# Altium PCB PCB22-guillaume.PcbDoc
Units mm, origin at the board's own origin, x right, y up, seen from the top; angles counter-clockwise.
Board outline 123.19 x 80.01 mm, 2 copper layers (Top Layer, Bottom Layer); 33 components, 35 nets, 117 pads, 23 vias.
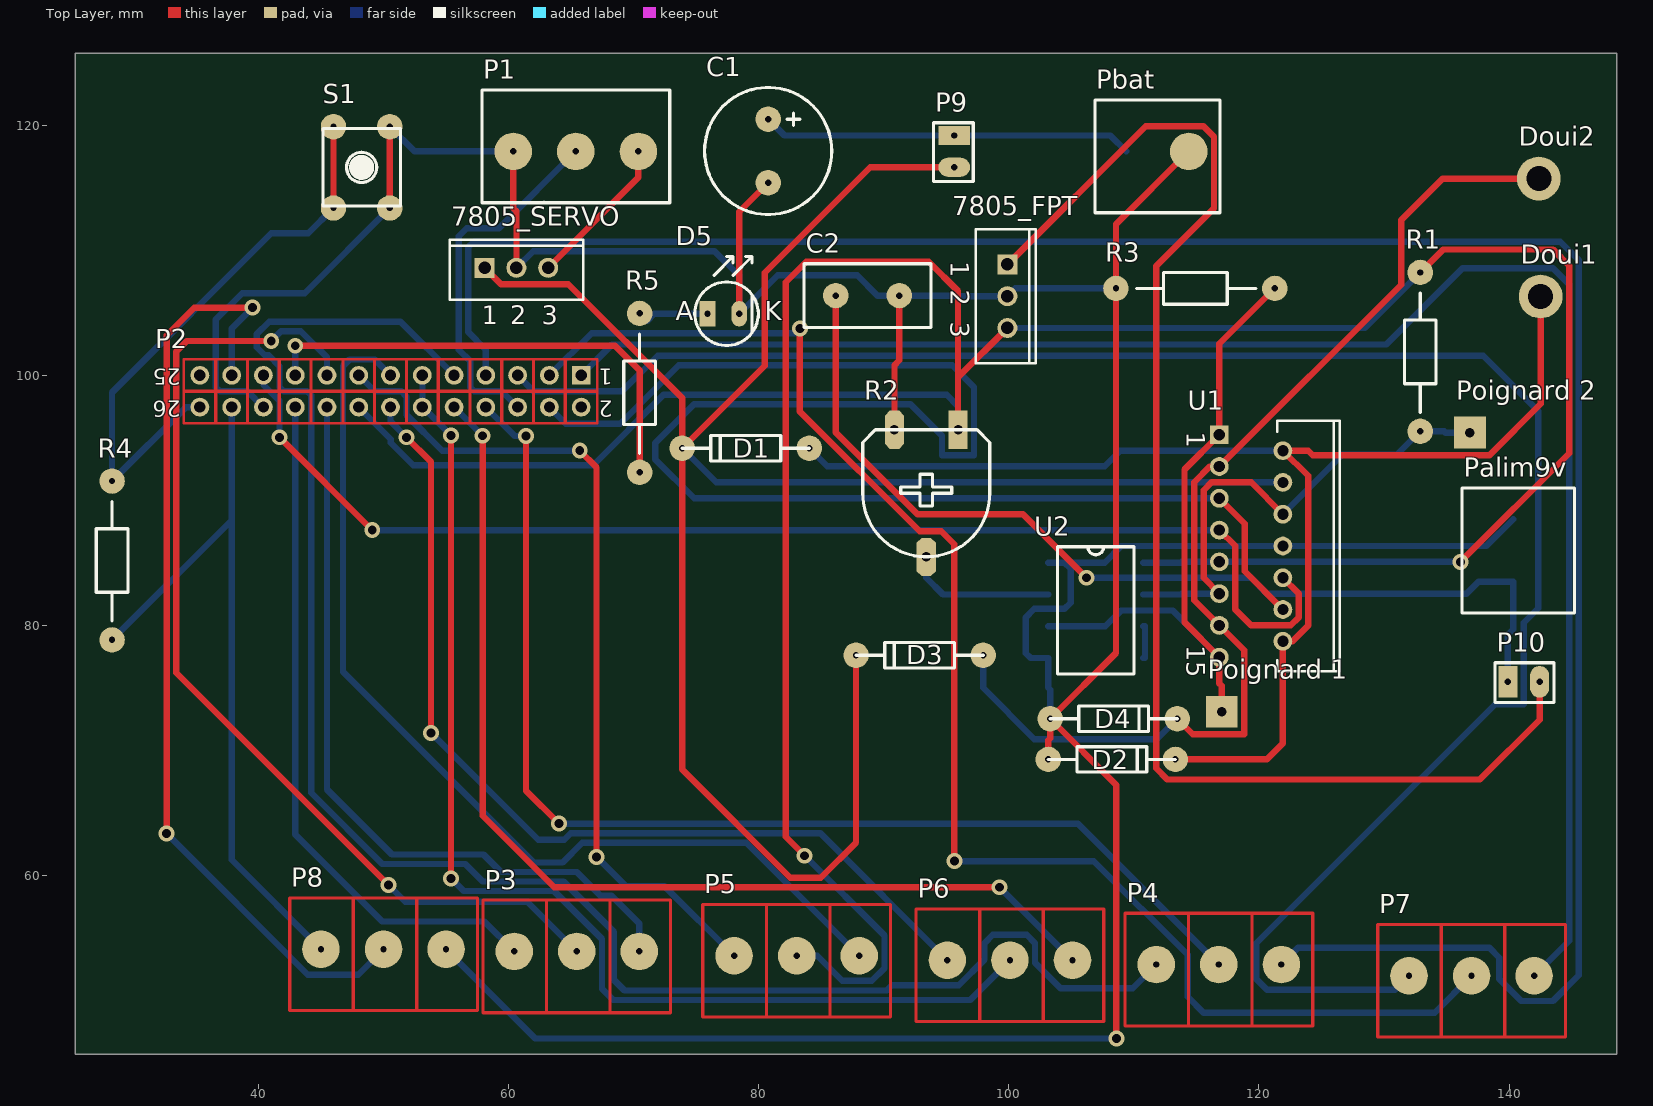
[diagram p0: Top Layer view]
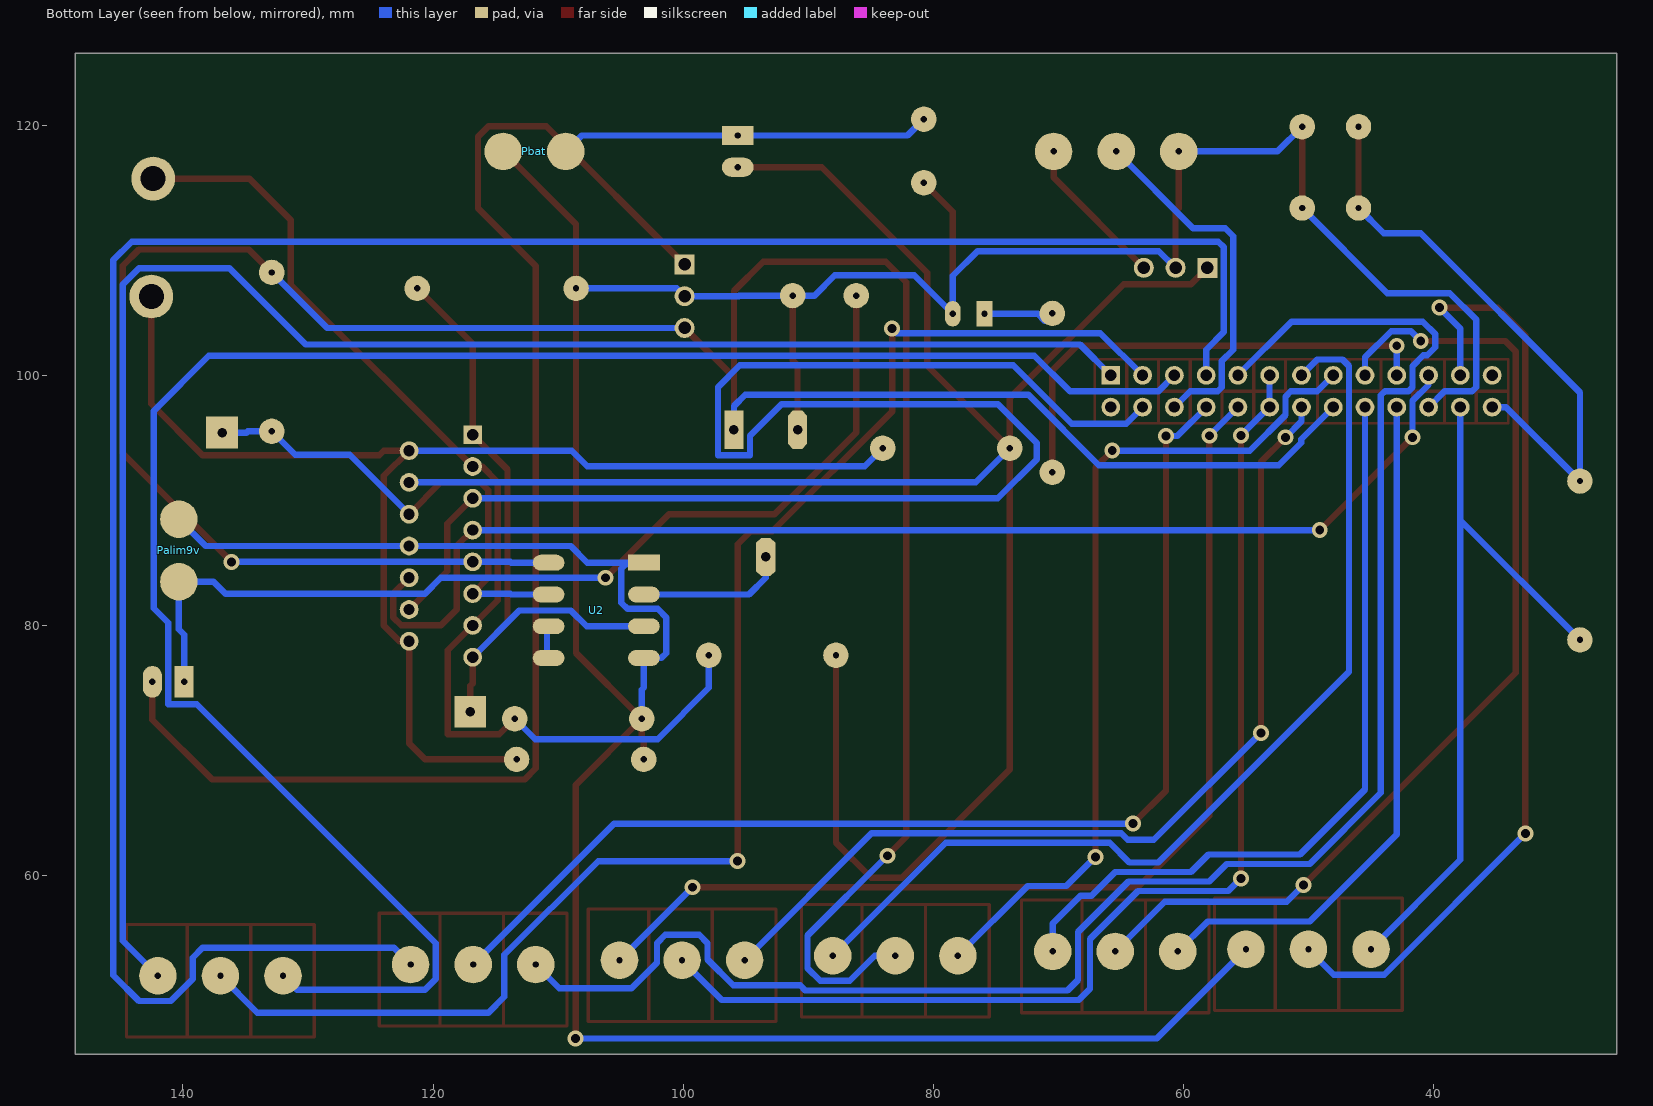
[diagram p1: Bottom Layer view, seen from below]

## Layer stack, top to bottom
Top Layer: signal copper 0.0356
Dielectric: dielectric 0.32, FR-4, Dk 4.8
Bottom Layer: signal copper 0.0356

## Board outline
25.4,125.73 148.59,125.73 148.59,45.72 25.4,45.72

## Design rules (kind name [scope] priority, off if disabled: settings)
Clearance [All] p1: gap=0.254
PolygonConnect [All] p1: connectstyle=Relief reliefconductorwidth=0.254 reliefentries=4 polygonreliefangle="90 Angle"
RoutingLayers RoutingLayers_1 [(InNet('RX') OR InNet('IN1') OR InNet('IN2') OR InNet('IN3'))] p1: top layer_v5=FALSE bottom layer_v5=TRUE
RoutingLayers [All] p2: top layer_v5=TRUE bottom layer_v5=TRUE
RoutingVias [All] p1: holewidth=0.711 width=1.27 viastyle="Through Hole" minholewidth=0.711 minwidth=1.27 maxholewidth=0.711 maxwidth=1.27
SilkscreenOverComponentPads [All] p1: minsilkscreentomaskgap=0.254
SolderMaskExpansion [All] p1: expansion=0.102
Width [All] p1: maxlimit=0.508 minlimit=0.381 preferedwidth=0.508 minimp=50.000000 maximp=50.000000 favimp=50.000000
26 further rules are at their usual default settings.

## Components (designator, comment, footprint, x,y, rotation, side; value= is the part's Value field where it differs from the comment)
7805_FPT "SCR" TO-220-AB 99.9,106.325 r270 top
7805_SERVO "SCR" TO-220-AB 60.65,108.6 r0 top
C1 "Cap Pol2" Capa2_pol 80.775,120.475 r270 top
C2 "Cap2" CAPA2 86.175,106.375 r0 top
D1 "Diode 1N4148" Ddiode 73.9,94.175 r0 top
D2 "Diode 1N4148" Ddiode 113.325,69.3 r180 top
D3 "Diode 1N4148" Ddiode 87.8,77.625 r0 top
D4 "Diode 1N4148" Ddiode 113.475,72.55 r180 top
D5 "Led" LED 75.925,104.925 r0 top
Doui1 "douille_2mm" Douille-2mm 142.525,106.3 r90 top
Doui2 "douille_2mm" Douille-2mm 142.375,115.725 r90 top
P1 "Bornier Servomoteur" Bornier_3#1 72.9,117.9 r180 top
P2 "Header 13X2" HDR2X13 65.825,100 r180 top
P3 "Bornier_3" Bornier_3#2 57.975,53.95 r0 top
P4 "Bornier_3" Bornier_3#2 109.3,52.9 r0 top
P5 "Bornier_3" Bornier_3#2 75.55,53.6 r0 top
P6 "Bornier_3" Bornier_3#2 92.6,53.25 r0 top
P7 "Bornier_3" Bornier_3#2 129.5,52 r0 top
P8 "Bornier_3" Bornier_3#2 42.525,54.125 r0 top
P9 "Jumper" picot2 95.65,119.175 r0 top
P10 "Jumper" picot2 139.9,75.5 r90 top
Palim9v "Alim 9V" Bornier_2#1 140.325,81 r90 top
Pbat "Batterie" Bornier_2#2 106.9,117.9 r0 top
"Poignard 1" "Poignard" Poignard 117.025,73.1 r90 top
"Poignard 2" "Poignard" Poignard 136.875,95.425 r90 top
R1 "Res2" res5_1/4W 132.9,95.525 r90 top
R2 "RPot" AJUSTABLE 95.95,95.65 r180 top
R3 "Res2" res5_1/4W 121.275,106.95 r180 top
R4 "Res2" res5_1/4W 28.325,78.85 r90 top
R5 "Res2" res5_1/4W 70.5,92.25 r90 top
S1 "SW-PB" SW_BP 48.275,116.625 r270 top
U1 "L298N" Multiwatt15V 119.38,86.36 r270 top
U2 "LM311N" DIP8 103.15,85.025 r0 top

## Footprints (in the part's own frame and the unit in brackets; to place one, negate y for a bottom-side part, rotate by r counter-clockwise, add the part's x,y. Pads: shape width x height; smd on the part's side, far side on the other; paste and mask are expansions set on the pad)
AJUSTABLE [mil]
  rect 60x120 hole 30: 1(0,0)
  oct 60x120 hole 30: 2(100,400) 3(200,0)
  silkscreen extent -100,0 300,400
Bornier_2#1 [mm]
  round 3 smd far side: 1(2.5,0) 2(7.5,0)
  silkscreen extent 0,-4.9 10,4.1
Bornier_2#2 [mm]
  round 3 smd far side: 1(2.5,0)
  round 3 all layers, no hole: 2(7.5,0)
  silkscreen extent 0,-4.9 10,4.1
Bornier_3#1 [mm]
  round 3 hole 0.508: 1(2.5,0) 2(7.5,0) 3(12.5,0)
  silkscreen extent 0,-4.9 15,4.1
Bornier_3#2 [mm]
  round 3 hole 0.508: 1(2.5,0) 2(7.5,0) 3(12.5,0)
  Top Layer lines w0.254: 5.08,-4.9 5.08,4.064 ; 10.16,-4.9 10.16,4.1 ; 0,-4.9 15,-4.9 15,4.1 0,4.1 0,-4.9
CAPA2 [mil]
  round 80 hole 20: 1(0,0) 2(200,0)
  silkscreen extent -100,-100 300,100
Capa2_pol [mil]
  round 80 hole 20: 1(0,0) 2(200,0)
  silkscreen extent -100,-200 300,200
Ddiode [mil]
  round 80 hole 20: A(400,0) K(0,0)
  silkscreen extent 0,-40 400,40
DIP8 [mil]
  rect 100x50 smd far side: 1(0,0)
  oval 100x50 smd far side: 2(0,-100) 3(0,-200) 4(0,-300) 5(300,-300) 6(300,-200) 7(300,-100) 8(300,0)
  silkscreen extent 30,-350 270,50
Douille-2mm [mm]
  round 3.5 hole 2: 1(0,0)
HDR2X13 [mm] "Connector; Header; 13x2 Position"
  rect 1.5x1.5 hole 0.9: 1(0,0)
  round 1.5 hole 0.9: 2(0,2.54) 3(2.54,0) 4(2.54,2.54) 5(5.08,0) 6(5.08,2.54) 7(7.62,0) 8(7.62,2.54) 9(10.16,0) 10(10.16,2.54) 11(12.7,0) 12(12.7,2.54) 13(15.24,0) 14(15.24,2.54) 15(17.78,0) 16(17.78,2.54) 17(20.32,0) 18(20.32,2.54) 19(22.86,0) 20(22.86,2.54) 21(25.4,0) 22(25.4,2.54) 23(27.94,0) 24(27.94,2.54) 25(30.48,0) 26(30.48,2.54)
  Top Layer lines w0.2: 31.75,3.81 -1.27,3.81 -1.27,-1.27 31.75,-1.27 31.75,3.81
  Top Layer lines w0.254: 31.623,1.27 -1.27,1.27 ; 29.21,3.81 29.21,-1.27 ; 26.67,3.81 26.67,-1.27 ; 24.13,3.81 24.13,-1.27 ; 21.59,3.81 21.59,-1.27 ; 19.05,3.81 19.05,-1.27 ; 16.51,3.81 16.51,-1.27 ; 13.97,3.81 13.97,-1.27 ; 11.43,3.81 11.43,-1.27 ; 8.89,3.81 8.89,-1.27 ; 6.35,3.81 6.35,-1.27 ; 3.81,3.81 3.81,-1.27 ; 1.27,3.81 1.27,-1.27
LED [mil]
  rect 50x80 hole 20: 1(0,0)
  oval 50x80 hole 20: 2(100,0)
  silkscreen extent -40,-100 160,180
Multiwatt15V [mm] "TO, Thru-Hole, Vertical, Heatsink Mounted; 15 Bent Staggered Leads; Pitch 1.27 mm"
  rect 1.5x1.5 hole 0.9: 1(-8.89,-2.54)
  round 1.5 hole 0.9: 2(-7.62,2.54) 3(-6.35,-2.54) 4(-5.08,2.54) 5(-3.81,-2.54) 6(-2.54,2.54) 7(-1.27,-2.54) 8(0,2.54) 9(1.27,-2.54) 10(2.54,2.54) 11(3.81,-2.54) 12(5.08,2.54) 13(6.35,-2.54) 14(7.62,2.54) 15(8.89,-2.54)
  silkscreen extent -10,2.09 10,7.09
picot2 [mil]
  rect 100x60 hole 20: 1(0,0)
  oval 100x60 hole 20: 2(0,-100)
  silkscreen extent -65,-145 60,40
Poignard [mil]
  rect 100x100 hole 30: 1(0,0)
res5_1/4W [mil]
  round 80 hole 20: 1(0,0) 2(500,0)
  silkscreen extent 60,-50 435,50
SW_BP [mil]
  round 80 hole 20: 1(-127.95,88.58) 2(127.95,88.58) 3(-127.95,-88.58) 4(127.95,-88.58)
  silkscreen extent -122,-122 122,122
TO-220-AB [mm] "TO, Thru-Hole, Vertical, Heatsink Mounted; 3 In-Line Leads; Pitch 2.54 mm"
  rect 1.6x1.6 hole 1: 1(-2.54,0)
  round 1.6 hole 1: 2(0,0) 3(2.54,0)
  silkscreen extent -5.35,-2.55 5.35,2.25

## Part data
7805_FPT 7805_SERVO: "Silicon Controlled Rectifier"
C1: "Polarized Capacitor (Radial)"
C2: "Capacitor"
D1 D2 D3 D4: "High Conductance Fast Diode"
D5: "LED"
Doui1 Doui2: "1-Pin"
P1: library part Bornier_3, "Header, 3-Pin"
P2: "Header, 13-Pin, Dual row"
P3 P4 P5 P6 P7 P8: "Header, 3-Pin"
Palim9v Pbat: library part Bornier_2, "Header, 2-Pin"
R1 R3 R4 R5: "Resistor"
R2: "Potentiometer"
S1: "Switch"
U1: "Dual Full Bridge Driver"
U2: "Voltage Comparator"

## Via types
v1: diameter 1.27, hole 0.711, Top Layer to Bottom Layer, 23 vias

## Nets (pads, with @x,y where several pads share a name; then routed paths per layer and width w, separated by ;. In a path a pad name is that pad's centre, name@x,y a point inside that pad or via, vN(x,y) a via of type N, cw(c..) or ccw(c..) an arc to the next point about the centre after c; other vN are vias at no path point)
3V3FLYPORT: P2.24 P8.1 R4.1 | length 59.8
  Bottom Layer w0.508: R4.1 37.885,88.41 ; P2.24 37.885,88.41 ; P8.1 37.885,61.265 37.885,88.41
AN1_23: P2.23 P8.2 | length 76.5
  Top Layer w0.508: v1(32.69,63.373) 32.69,103.2 34.9,105.41 v1(39.548,105.41)
  Bottom Layer w0.508: v1(32.69,63.373) 43.967,52.095 47.995,52.095 P8.2 ; P2.23 37.885,103.747 v1(39.548,105.41)
AN4_18: P2.18 P3.3 | length 62.2
  Bottom Layer w0.508: P2.18 45.505,66.89 50.698,61.697 58.014,61.697 59.411,60.3 65.481,60.3 67.369,58.412 68.25,58.412 70.475,56.187 P3.3
AN5_20: P2.20 P3.1 | length 55.5
  Bottom Layer w0.508: P2.20 42.965,63.293 49.921,56.337 58.088,56.337 P3.1
BOARD_LED: P2.19 R5.1 | length 38.9
  Top Layer w0.508: v1(42.965,102.362) 68.529,102.362 70.5,100.391 R5.1
  Bottom Layer w0.508: P2.19 v1(42.965,102.362)
EN: "Poignard 2.1" R1.1 U1.6 U1.11 U2.7 | length 40.3
  Top Layer w0.508: U1.11 115.582,83.808 115.582,90.805 116.217,91.44 119.38,91.44 U1.6
  Bottom Layer w0.508: U2.7 113.767,82.485 113.832,82.55 U1.11 ; U1.6 126.67,93.65 131.025,93.65 R1.1 134.823,95.525 134.923,95.425 136.875,95.425
GND: 7805_FPT.2 7805_SERVO.2 C1.2 C2.2 D2.A D4.A D5.2 P1.3 P2.22 P8.3 Palim9v.2 Pbat.2 R2.3 R3.2 S1.1 S1.2 U1.8 U2.1 U2.4 | length 324.3
  Top Layer w0.508: S1.2 S1.1 ; P1.3 60.4,113.356 60.65,113.106 7805_SERVO.2 ; D5.2 78.465,113.085 C1.2 ; R2.3 90.87,100.813 91.255,101.198 C2.2 ; D2.A 103.165,70.841 103.315,70.991 D4.A ; v1(108.61,46.99) 108.61,67.255 D4.A ; Pbat.2 108.575,112.075 R3.2 108.575,77.81 D4.A
  Bottom Layer w0.508: P2.22 39.155,98.73 36.957,98.73 36.627,99.06 36.627,104.463 38.735,106.571 43.721,106.571 S1.2 ; S1.1 52.5,117.9 P1.3 ; P8.3 62.16,46.99 v1(108.61,46.99) ; 7805_SERVO.2 61.981,109.931 76.484,109.931 78.465,107.95 D5.2 81.541,108.001 87.884,108.001 89.51,106.375 C2.2 95.529,106.375 95.579,106.325 7805_FPT.2 100.525,106.95 R3.2 ; U2.1 104.457,85.025 ; D4.A 103.315,74.879 103.15,75.044 U2.4 101.754,77.405 101.371,77.787 101.371,80.645 102.057,81.331 104.457,81.331 104.953,81.826 104.953,84.53 104.457,85.025 ; Palim9v.2 138.185,86.36 U1.8 109.006,86.36 107.671,85.025 104.457,85.025
I2C_CLK: P2.1 P7.3 | length 139.5
  Bottom Layer w0.508: P2.1 68.289,102.464 130.179,102.464 136.275,108.56 143.51,108.56 144.805,107.264 144.805,54.805 P7.3
I2C_DATA: P2.3 P7.2 | length 119.8
  Top Layer w0.508: v1(83.312,103.734) 83.312,97.104 92.888,87.528 94.615,87.528 95.656,86.487 v1(95.656,61.163)
  Bottom Layer w0.508: P2.3 66.663,103.378 82.956,103.378 v1(83.312,103.734) ; v1(95.656,61.163) 106.807,61.163 114.3,53.67 114.3,50.317 115.57,49.047 134.047,49.047 P7.2
IN1: P2.5 P7.1 | length 154.3
  Bottom Layer w0.508: P2.5 62.015,98.73 69.088,98.73 71.933,101.575 137.922,101.575 142.342,97.155 142.342,81.382 141.17,80.21 141.17,73.711 138.887,73.711 119.786,54.61 119.786,51.74 120.65,50.876 130.876,50.876 P7.1
IN2: P2.7 P4.3 | length 185.5
  Bottom Layer w0.508: P2.7 58.205,102.053 56.794,103.463 56.794,110.261 57.226,110.693 144.094,110.693 145.567,109.22 145.567,52.045 143.51,49.987 140.97,49.987 139.217,51.74 139.217,53.442 138.43,54.229 123.129,54.229 P4.3
IN3: P2.9 P4.1 | length 140.1
  Bottom Layer w0.508: P2.9 51.38,104.285 40.884,104.285 39.903,103.305 39.903,102.235 40.538,101.6 40.843,101.6 41.707,100.736 41.707,99.06 42.025,98.742 43.906,98.742 44.247,98.401 44.247,66.624 49.936,60.935 56.566,60.935 57.963,59.538 64.414,59.538 68.453,55.499 68.453,51.664 69.287,50.83 90.244,50.83 90.656,51.242 96.012,51.242 98.069,53.299 98.069,54.61 98.73,55.27 101.448,55.27 102.108,54.61 102.108,53.035 104.14,51.003 109.903,51.003 P4.1
MOTOR1: D1.A D2.K Doui1.1 U1.2 U1.14 | length 104.7
  Top Layer w0.508: D2.K 120.65,69.3 121.92,70.57 U1.14 122.682,78.74 123.94,79.998 123.94,91.96 U1.2 123.952,93.98 124.308,93.624 138.43,93.624 142.525,97.719 Doui1.1
  Bottom Layer w0.508: D1.A 85.5,92.735 107.671,92.735 108.915,93.98 U1.2
MOTOR2: D3.A D4.K Doui2.1 U1.3 U1.13 | length 88.8
  Top Layer w0.508: D4.K 114.727,71.298 118.821,71.298 118.821,78.029 U1.13 114.82,82.03 114.82,91.452 116.078,92.71 U1.3 131.369,107.239 131.369,112.42 134.673,115.725 Doui2.1
  Bottom Layer w0.508: D3.A 97.96,75.014 102.057,70.917 111.842,70.917 D4.K
NetD5_1: D5.1 R5.2 | length 5.9
  Bottom Layer w0.508: R5.2 71.1,104.35 71.676,104.925 D5.1
"NetPoignard 1_1": "Poignard 1.1" R3.1 U1.1 U1.15 U2.3 | length 53.8
  Top Layer w0.508: 117.025,73.1 117.025,75.184 116.84,75.369 U1.15 114.058,80.252 114.058,92.468 U1.1 116.84,102.515 R3.1
  Bottom Layer w0.508: U2.3 107.733,79.945 108.991,81.204 113.106,81.204 U1.15
NetR2_2: R2.2 U2.2 | length 12
  Bottom Layer w0.508: R2.2 93.41,83.82 94.745,82.485 U2.2
NetU2_5: U2.5 U2.6 | length 2.8
  Bottom Layer w0.508: U2.5 110.897,77.405 110.897,79.945 U2.6
OUT3_PWM: P2.17 P3.2 | length 82
  Top Layer w0.508: v1(41.046,102.743) 34.29,102.743 33.452,101.905 33.452,76.225 v1(50.412,59.265)
  Bottom Layer w0.508: v1(41.046,102.743) 41.827,103.523 43.422,103.523 45.505,101.44 P2.17 ; v1(50.412,59.265) 51.765,57.912 61.513,57.912 P3.2
PWM1: P2.4 U1.5 U1.12 | length 130.7
  Top Layer w0.508: U1.5 118.86,88.15 118.86,84.34 U1.12
  Bottom Layer w0.508: P2.4 64.606,96.139 68.954,96.139 73.627,100.813 95.479,100.813 97.231,99.06 97.231,93.599 94.666,93.599 94.666,95.167 92.151,97.682 74.847,97.682 71.755,94.59 71.755,93.269 74.854,90.17 U1.5
PWM2: P2.21 U1.7 U1.10 | length 100.1
  Top Layer w0.508: v1(41.707,95.047) v1(49.124,87.63) ; U1.7 118.098,86.372 118.098,81.28 119.368,80.01 122.543,80.01 123.178,80.645 123.178,82.562 U1.10
  Bottom Layer w0.508: P2.21 40.425,99.239 41.707,97.957 v1(41.707,95.047) ; v1(49.124,87.63) U1.7
PWM_SERVO: P1.2 P2.6 | length 29.1
  Bottom Layer w0.508: P2.6 59.475,98.73 57.277,98.73 56.947,99.06 56.947,101.143 56.032,102.057 56.032,111.125 56.667,111.76 59.26,111.76 P1.2
RST_B: P2.26 R4.2 S1.3 S1.4 | length 46.9
  Top Layer w0.508: S1.4 S1.3
  Bottom Layer w0.508: P2.26 34.235,97.46 R4.2 28.325,98.632 41.046,111.354 44.004,111.354 S1.4
RX: P2.13 P5.3 | length 81
  Bottom Layer w0.508: P2.13 49.315,101.27 47.307,101.27 46.787,100.749 46.787,76.302 62.027,61.062 64.338,61.062 65.913,62.636 79.014,62.636 P5.3
SPI_CLK_8: P2.8 P4.2 | length 93.7
  Top Layer w0.508: v1(61.417,95.148) 61.417,66.802 v1(64.059,64.16)
  Bottom Layer w0.508: P2.8 60.517,95.148 v1(61.417,95.148) ; v1(64.059,64.16) 105.54,64.16 P4.2
SPI_CS_14: P2.14 P6.1 | length 76.6
  Top Layer w0.508: v1(51.855,95.047) 53.823,93.079 v1(53.823,71.425)
  Bottom Layer w0.508: P2.14 50.585,96.317 v1(51.855,95.047) ; v1(53.823,71.425) 62.382,62.865 64.465,62.865 64.999,63.398 84.952,63.398 P6.1
SPI_IN_12: P2.11 P2.12 P6.2 | length 93.5
  Top Layer w0.508: v1(55.423,59.792) v1(55.423,95.199)
  Bottom Layer w0.508: P2.12 P2.12@53.144,97.478 ; P2.11 53.137,99.988 P2.12@53.144,97.478 ; v1(55.423,59.792) 56.439,58.776 63.652,58.776 67.488,54.94 67.488,50.969 68.389,50.068 96.918,50.068 P6.2 ; v1(55.423,95.199) P2.12@53.144,97.478
SPI_OUT_10: P2.10 P6.3 | length 85.5
  Top Layer w0.508: v1(57.951,95.174) 57.951,64.807 63.678,59.08 v1(99.27,59.08)
  Bottom Layer w0.508: P2.10 v1(57.951,95.174) ; v1(99.27,59.08) P6.3
TX: P2.15 P5.1 | length 68.3
  Top Layer w0.508: v1(65.709,93.981) 67.056,92.634 v1(67.056,61.493)
  Bottom Layer w0.508: P2.15 49.315,98.73 51.435,98.73 51.867,98.298 51.867,96.825 54.711,93.981 v1(65.709,93.981) ; v1(67.056,61.493) 69.376,59.174 72.476,59.174 P5.1
V_5V_FPT: 7805_FPT.3 P2.16 P5.2 R1.2 R2.1 U1.9 U2.8 | length 253.8
  Top Layer w0.508: v1(83.693,61.595) 82.169,63.119 82.169,107.442 83.82,109.093 93.599,109.093 95.95,106.742 95.95,99.835 ; R2.1 95.95,99.835 ; 7805_FPT.3 95.95,99.835 ; R1.2 134.733,110.058 143.51,110.058 144.805,108.763 144.805,93.777 v1(136.119,85.09)
  Bottom Layer w0.508: P2.16 50.614,94.891 50.614,94.612 52.415,92.812 66.777,92.812 72.409,98.444 95.053,98.444 95.95,97.547 R2.1 ; P5.2 84.684,53.6 86.692,51.592 89.057,51.592 90.068,52.603 90.068,55.22 v1(83.693,61.595) ; 7805_FPT.3 128.46,103.785 R1.2 ; U2.8 113.767,85.025 113.832,85.09 U1.9 v1(136.119,85.09)
V_5V_SERVO: 7805_SERVO.3 P1.1 | length 12.3
  Top Layer w0.508: 7805_SERVO.3 70.4,115.81 P1.1
V_9V: 7805_FPT.1 P10.2 | length 109.9
  Top Layer w0.508: 7805_FPT.1 110.948,119.913 115.57,119.913 116.408,119.075 116.408,113.36 111.785,108.737 111.785,68.58 112.674,67.691 137.665,67.691 142.44,72.466 P10.2
V_9V_BORNIER: C2.1 P10.1 Palim9v.1 | length 79
  Top Layer w0.508: C2.1 86.175,95.435 92.71,88.9 101.143,88.9 v1(106.223,83.82)
  Bottom Layer w0.508: v1(106.223,83.82) 119.38,83.82 120.65,82.55 136.601,82.55 137.551,83.5 Palim9v.1 140.325,79.698 139.9,79.273 P10.1
V_BAT: 7805_SERVO.1 D1.K D3.K P9.2 U1.4 | length 168
  Top Layer w0.508: 7805_SERVO.1 59.42,107.29 64.795,107.29 73.9,98.185 D1.K ; D3.K 87.8,62.654 84.988,59.842 82.55,59.842 73.9,68.492 D1.K ; P9.2 88.924,116.635 80.493,108.204 80.493,100.768 D1.K
  Bottom Layer w0.508: D1.K 76.635,91.44 U1.4
V_BAT_BORNIER: C1.1 P9.1 Pbat.1 | length 29.7
  Bottom Layer w0.508: C1.1 82.075,119.175 P9.1 108.125,119.175 Pbat.1
pads on no net: P2.2 P2.25

## Dimensions
148.59,45.72 to 25.4,45.72 on Top Layer
148.59,45.72 to 148.59,125.73 on Top Layer

## Text inside footprints (layer, text, board x,y; h text height)
7805_FPT: Top Overlay "3" at 95.375,104.285 h1.5 r270; Top Overlay "2" at 95.375,106.825 h1.5 r270; Top Overlay "1" at 95.375,109.115 h1.5 r270
7805_SERVO: Top Overlay "3" at 62.69,104.075 h1.5; Top Overlay "2" at 60.15,104.075 h1.5; Top Overlay "1" at 57.86,104.075 h1.5
D5: Top Overlay "A" at 73.385,104.417 h1.52; Top Overlay "K" at 80.497,104.417 h1.52
P2: Top Overlay "2" at 68.365,97.968 h1.27 r180; Top Overlay "1" at 68.365,100.508 h1.27 r180; Top Overlay "25" at 33.821,100.508 h1.27 r180; Top Overlay "26" at 33.821,97.968 h1.27 r180
U1: Top Overlay "1" at 114.215,95.48 h1.5 r270; Top Overlay "15" at 114.215,78.42 h1.5 r270